# EAGLE board lights (EAGLE 9.4.2)

Size 100 x 100 mm. Coordinates in mm from the lower left corner, seen from the top.
Outline: 0,0 100,0 100,100 0,100 0,0
Copper layers (1*16): Top 0.035mm / dielectric 1.5mm / Bottom 0.035mm
Design rules "default": minimum track width 6mil, minimum drill 0.35mm, track to track 6mil, track to pad 6mil, pad to pad 6mil, via to via 6mil, smd to smd 6mil, copper to edge 40mil, drill to drill 6mil, minimum pad ring 10mil, minimum via ring 8mil, stop-mask expansion 4mil, vias tented up to drill 0mil, thermal gap 10mil

## Footprints (pad centres in the part's own frame; a part is rotated, then mirrored left to right if it is on the bottom)
LED_5MM = drill 0.813 pad 1.88: A -1.27,0; K 1.27,0
SOIC127P600X175-14N = smd 1.525 x 0.7: 1 -2.712,3.81; 2 -2.712,2.54; 3 -2.712,1.27; 4 -2.712,0; 5 -2.712,-1.27; 6 -2.712,-2.54; 7 -2.712,-3.81; 8 2.712,-3.81; 9 2.712,-2.54; 10 2.712,-1.27; 11 2.712,0; 12 2.712,1.27; 13 2.712,2.54; 14 2.712,3.81
DIL28-3 = drill 0.813 long: 1 -16.51,-3.81; 2 -13.97,-3.81; 3 -11.43,-3.81; 4 -8.89,-3.81; 5 -6.35,-3.81; 6 -3.81,-3.81; 7 -1.27,-3.81; 8 1.27,-3.81; 9 3.81,-3.81; 10 6.35,-3.81; 11 8.89,-3.81; 12 11.43,-3.81; 13 13.97,-3.81; 14 16.51,-3.81; 15 16.51,3.81; 16 13.97,3.81; 17 11.43,3.81; 18 8.89,3.81; 19 6.35,3.81; 20 3.81,3.81; 21 1.27,3.81; 22 -1.27,3.81; 23 -3.81,3.81; 24 -6.35,3.81; 25 -8.89,3.81; 26 -11.43,3.81; 27 -13.97,3.81; 28 -16.51,3.81
0207/10 = drill 0.813 octagon: 1 -5.08,0; 2 5.08,0
GW22LHP = drill 0.6 pad 1 square: 1 0,0 | drill 0.6 pad 1: 2 0,-2.54; 3 0,-5.08; 4 -2.54,0; 5 -2.54,-2.54; 6 -2.54,-5.08
P120PKY20BR20K = drill 1.2 pad 1.8: 1 -3.75,-10; 2 0,-10; 3 3.75,-10 | drill 3.606 pad 5.408: MH1 -5.1,0; MH2 5.1,0

## Placement (x,y rotation side)
D1  LED-IRTSAL6100  [LED_5MM]  7.62,26.67 0 top
D2  LED-IRTSAL6100  [LED_5MM]  7.62,39.37 0 top
D3  [LED_5MM]  7.62,54.61 0 top
D4  LED-IRTSAL6100  [LED_5MM]  26.67,26.67 0 top
D5  LED-IRTSAL6100  [LED_5MM]  26.67,39.37 0 top
D6  [LED_5MM]  25.4,54.61 0 top
D7  LED-IRTSAL6100  [LED_5MM]  43.18,27.94 0 top
D8  LED-IRTSAL6100  [LED_5MM]  43.18,41.91 0 top
D9  [LED_5MM]  43.18,55.88 0 top
D10  LED-IRTSAL6100  [LED_5MM]  78.74,27.94 0 top
D11  LED-IRTSAL6100  [LED_5MM]  78.74,41.91 0 top
D12  [LED_5MM]  78.74,55.88 0 top
D13  LED-IRTSAL6100  [LED_5MM]  62.23,26.67 0 top
D14  LED-IRTSAL6100  [LED_5MM]  62.23,40.64 0 top
D15  [LED_5MM]  62.23,55.88 0 top
FRAME1  FRAME-LETTERNO_PACKAGE  [DUMMY]  -17.78,-2.54 0 top  (outside the outline)
FRAME2  FRAME-LETTERNO_PACKAGE  [DUMMY]  -38.1,-27.94 0 top  (outside the outline)
IC1  LM139DT  [SOIC127P600X175-14N]  21.59,77.47 90 top
IC2  LM139DT  [SOIC127P600X175-14N]  81.28,77.47 90 top
IC3  MCP23017SP  [DIL28-3]  50.8,77.47 0 top
R1  56  [0207/10]  15.24,26.67 270 top
R2  10k  [0207/10]  15.24,39.37 270 top
R3  100  [0207/10]  15.24,54.61 90 top
R4  56  [0207/10]  33.02,26.67 270 top
R5  10k  [0207/10]  33.02,39.37 90 top
R6  100  [0207/10]  31.75,54.61 90 top
R7  56  [0207/10]  49.53,27.94 270 top
R8  10k  [0207/10]  49.53,41.91 270 top
R9  100  [0207/10]  49.53,55.88 270 top
R10  56  [0207/10]  86.36,26.67 270 top
R11  10k  [0207/10]  86.36,40.64 270 top
R12  100  [0207/10]  86.36,55.88 270 top
R13  56  [0207/10]  68.58,26.67 270 top
R14  10k  [0207/10]  68.58,40.64 270 top
R15  100  [0207/10]  68.58,55.88 270 top
S4  GW22LHP  [GW22LHP]  68.58,95.25 0 top
S5  GW22LHP  [GW22LHP]  53.34,95.25 0 top
S6  GW22LHP  [GW22LHP]  60.96,95.25 0 top
VR1  P120PK-F20BR5K  [P120PKY20BR20K]  10.16,12.7 0 top
VR2  P120PK-F20BR5K  [P120PKY20BR20K]  27.94,12.7 0 top
VR3  P120PK-F20BR5K  [P120PKY20BR20K]  45.72,12.7 0 top
VR4  P120PK-F20BR5K  [P120PKY20BR20K]  81.28,12.7 0 top
VR5  P120PK-F20BR5K  [P120PKY20BR20K]  63.5,12.7 0 top

## Library data of the parts
D1 D2 D4 D5 D7 D8 D10 D11 D13 D14 = SparkFun-LED; PROD_ID: DIO-12058
D3 D6 D9 D12 D15 = SparkFun-LED
FRAME1 FRAME2 = SparkFun-Aesthetics; DESIGNER: Nobody; VERSION: v01
IC1 IC2 = SamacSys_Parts; DESCRIPTION: STMICROELECTRONICS - LM139DT - COMPARATOR, OPEN COLLECTOR, SOIC-14; HEIGHT: 1.75mm; MANUFACTURER_NAME: STMicroelectronics; MANUFACTURER_PART_NUMBER: LM139DT; MOUSER_PART_NUMBER: 511-LM139DT; MOUSER_PRICE-STOCK: https://www.mouser.com/Search/Refine.aspx?Keyword=511-LM139DT
IC3 = microchip; MF: MICROCHIP; MPN: MCP23017-E/SP; OC_FARNELL: 1332088; OC_NEWARK: 31K2959
R1-R15 = rcl; SPICEPREFIX: R
S4-S6 = SamacSys_Parts; ALLIED_NUMBER: 70365614; ALLIED_PRICE-STOCK: https://www.alliedelec.com/nkkswitches-gw22lhp/70365614/; DESCRIPTION: NKK SWITCHES - GW22LHP - ROCKER SWITCH, DPDT, ON-ON; HEIGHT: 10.8mm; MANUFACTURER_NAME: NKK Switches; MANUFACTURER_PART_NUMBER: GW22LHP; MOUSER_PART_NUMBER: 633-GW22LHP; MOUSER_PRICE-STOCK: https://www.mouser.com/Search/Refine.aspx?Keyword=633-GW22LHP
VR1-VR5 = SamacSys_Parts; DESCRIPTION: Potentiometers PCB MOUNT - ROTARY POTENTIOMETER 5K 20%; HEIGHT: 20mm; MANUFACTURER_NAME: BI Technologies; MANUFACTURER_PART_NUMBER: P120PK-F20BR5K; MOUSER_PART_NUMBER: 858-P120PK-F20BR5K; MOUSER_PRICE-STOCK: https://www.mouser.com/Search/Refine.aspx?Keyword=858-P120PK-F20BR5K

## Nets
!RESET: IC3.18
GND: IC1.12 IC2.12 IC3.10 R1.1 R2.1 R3.1 R4.1 R5.1 R6.1 R7.1 R8.1 R9.1 R10.1 R11.1 R12.1 R13.1 R14.1 R15.1 S4.4 S5.4 S6.4 VR1.1 VR2.1 VR3.1 VR4.1 VR5.1
N$1: D1.K R1.2
N$2: D2.A IC1.11 R2.2
N$3: D3.K R3.2
N$4: IC1.10 VR1.2
N$5: D4.K R4.2
N$6: D5.A IC1.5 R5.2
N$7: IC1.4 VR2.2
N$8: D6.K R6.2
N$9: D7.K R7.2
N$10: D8.A IC1.9 R8.2
N$11: IC1.8 VR3.2
N$12: D9.K R9.2
N$13: D10.K R10.2
N$14: D11.A IC2.5 R11.2
N$15: IC2.4 VR4.2
N$16: D12.K R12.2
N$17: D13.K R13.2
N$18: D14.A IC1.7 R14.2
N$19: IC1.6 VR5.2
N$20: D15.K R15.2
N$24: IC3.15 S4.5
N$25: IC3.16 S6.5
N$26: IC3.17 S5.5
PROX1: IC1.2 IC3.21
PROX2: IC1.1 IC3.22
PROX3: IC1.14 IC3.23
PROX4: IC1.13 IC3.24
PROX5: IC2.2 IC3.25
SCL: IC3.12
SDA: IC3.13
VDD: D1.A D2.K D3.A D4.A D5.K D6.A D7.A D8.K D9.A D10.A D11.K D12.A D13.A D14.K D15.A IC1.3 IC2.3 IC3.9 S4.6 S5.6 S6.6 VR1.3 VR2.3 VR3.3 VR4.3 VR5.3

## Tracks (layer width: path | path; a pad name or v marks a point on that pad's centre or on a via)
GND  (25 unrouted)
N$1  (1 unrouted)
N$2  (2 unrouted)
N$3  (1 unrouted)
N$4  (1 unrouted)
N$5  (1 unrouted)
N$6  (2 unrouted)
N$7  (1 unrouted)
N$8  (1 unrouted)
N$9  (1 unrouted)
N$10  (2 unrouted)
N$11  (1 unrouted)
N$12  (1 unrouted)
N$13  (1 unrouted)
N$14  (2 unrouted)
N$15  (1 unrouted)
N$16  (1 unrouted)
N$17  (1 unrouted)
N$18  (2 unrouted)
N$19  (1 unrouted)
N$20  (1 unrouted)
N$24  (1 unrouted)
N$25  (1 unrouted)
N$26  (1 unrouted)
PROX1  (1 unrouted)
PROX2  (1 unrouted)
PROX3  (1 unrouted)
PROX4  (1 unrouted)
PROX5  (1 unrouted)
VDD  (25 unrouted)